# Altium PCB PCB1.PcbDoc
Units mil, origin at the board's own origin, x right, y up, seen from the top; angles counter-clockwise.
Board outline 1585 x 1070 mil, 2 copper layers (Top Layer, Bottom Layer); 15 components, 10 nets, 73 pads, 0 vias.
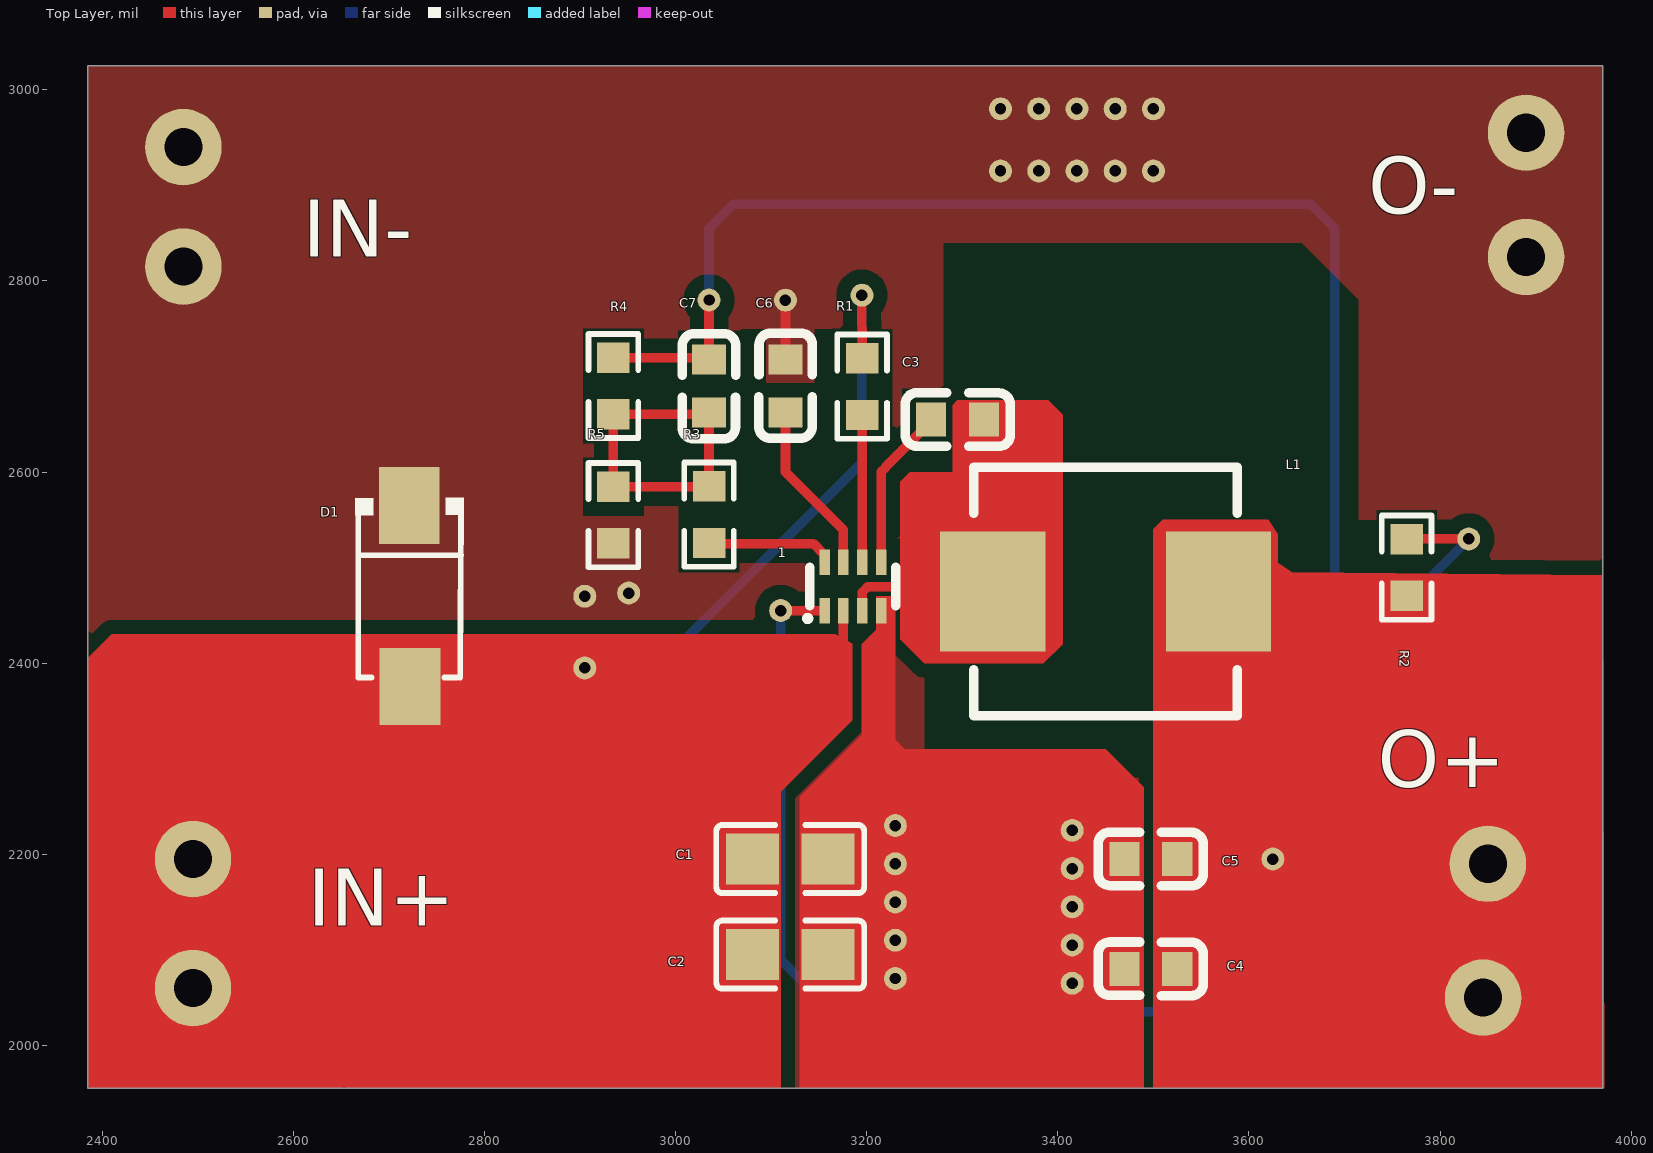
[diagram p0: Top Layer view]
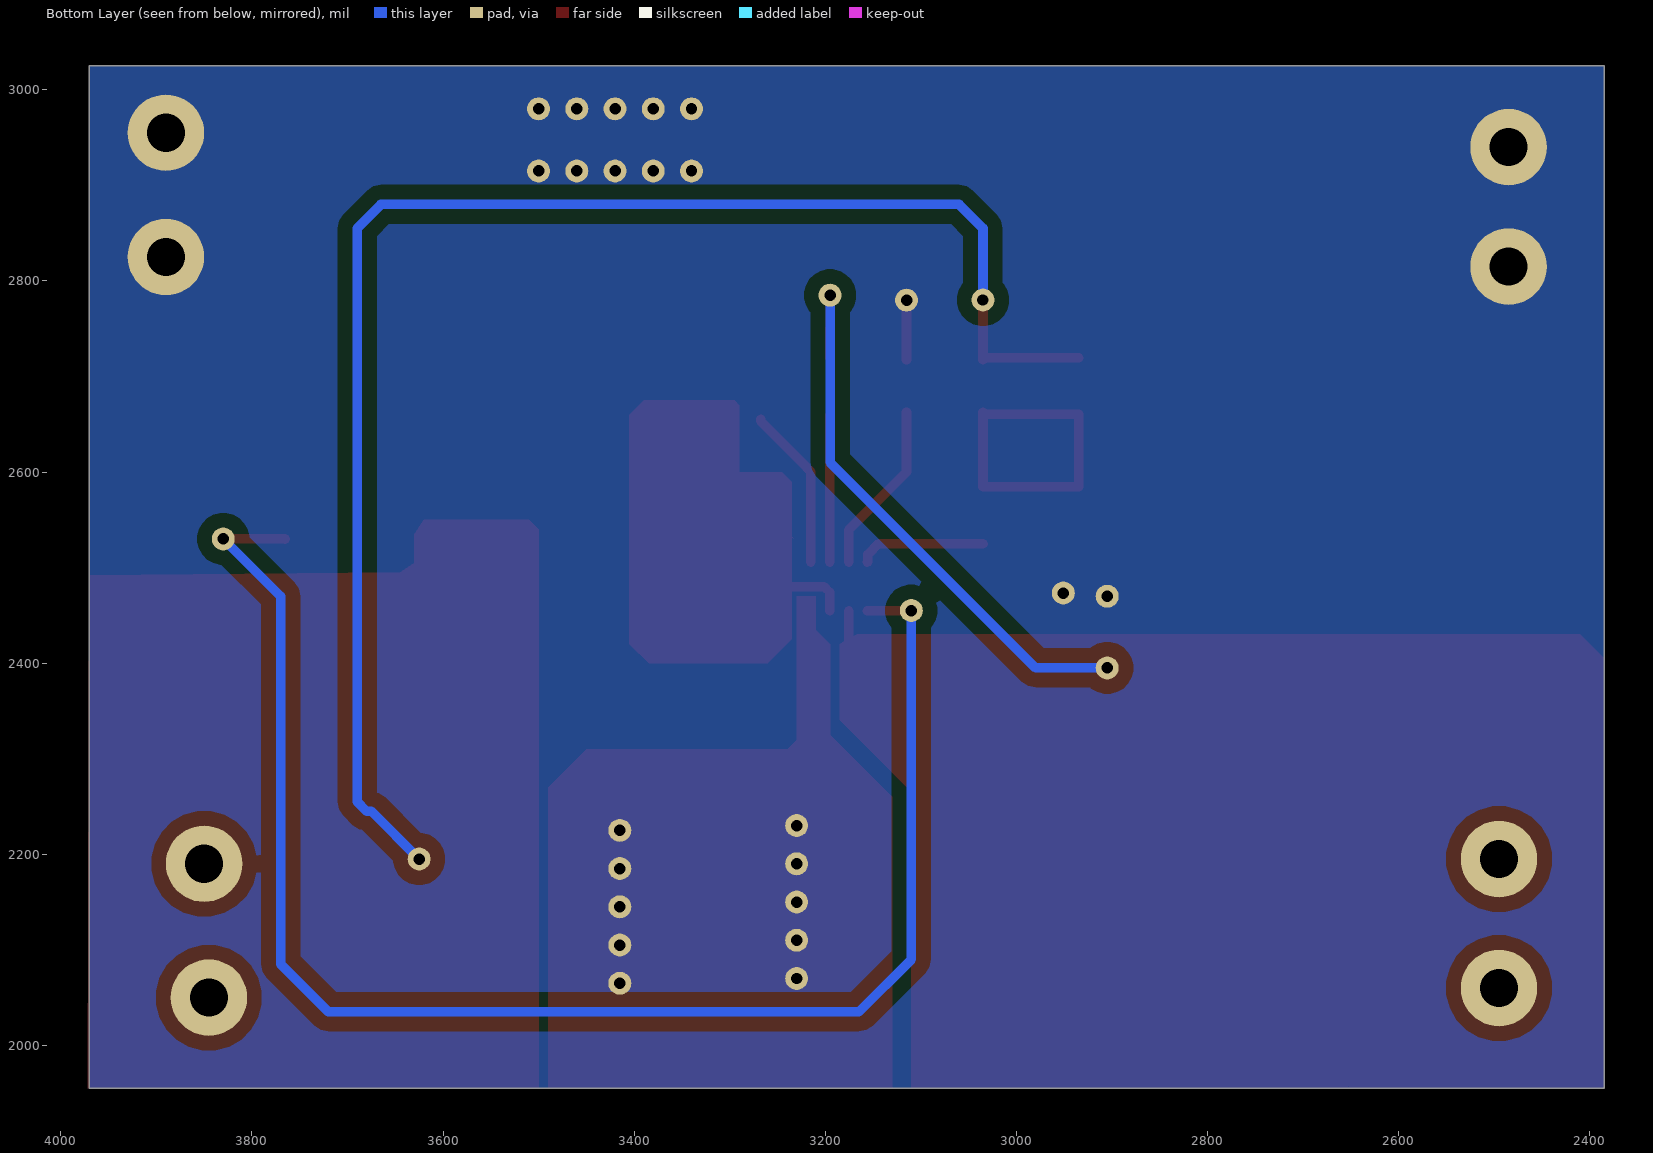
[diagram p1: Bottom Layer view, seen from below]

## Layer stack, top to bottom
Top Solder: solder mask 0.4, Solder Resist, Dk 3.5
Top Layer: signal copper 1.4
Dielectric 1: dielectric 12.6, FR-4, Dk 4.8
Bottom Layer: signal copper 1.4
Bottom Solder: solder mask 0.4, Solder Resist, Dk 3.5

## Board outline
2385,1955 2385,3025 3970,3025 3970,1955

## Design rules (kind name [scope] priority, off if disabled: settings)
Clearance poly [InPolygon] p1: gap=15 ignorepadtopadclearanceinfootprint=FALSE
Clearance Clearance_1 [All] p2: gap=5 ignorepadtopadclearanceinfootprint=FALSE
PlaneConnect [All] p1: planeconnectstyle=Direct reliefexpansion=20 reliefentries=4 reliefconductorwidth=10 reliefairgap=10
PolygonConnect [All] p1: connectstyle=Direct reliefconductorwidth=10 reliefentries=4 polygonreliefangle="90 Angle" airgapwidth=10
RoutingVias [All] p1: holewidth=28 width=50 viastyle="Through Hole" minholewidth=28 minwidth=50 maxholewidth=28 maxwidth=50
SolderMaskExpansion [All] p1: expansion=4 istentingtop=FALSE
Width [All] p1: maxlimit=10 minlimit=10 preferedwidth=10
29 further rules are at their usual default settings.

## Components (designator, comment, footprint, x,y, rotation, side; value= is the part's Value field where it differs from the comment)
1 "MP2338" PCBComponent_1 3185.31,2480.41 r270 top
C1 "22uF" C0805 3120,2195 r180 top
C2 "0.1uF" C0805 3120,2095 r180 top
C3 "0.1uF" C0603 3295,2655 r180 top
C4 "22uF" C0603 3497.44,2080 r0 top
C5 "22uF" C0603 3497.44,2195 r0 top
C6 "22nF" C0603 3115,2690 r270 top
C7 "300pF" C0603 3035,2690 r90 top
D1 "Component_2" PCBComponent_2 2725,2470 r270 top
L1 "6.8uH" IND-SMD_L7.0-W6.6 3450,2475 r0 top
R1 "191kΩ" R0603 3195.31,2689.38 r90 top
R2 "10kΩ" R0603 3765,2500 r270 top
R3 "10kΩ" R0603 3035,2555.34 r90 top
R4 "90.9kΩ" R0603 2935,2690 r90 top
R5 "10kΩ" R0603 2935,2555 r90 top

## Footprints (in the part's own frame and the unit in brackets; to place one, negate y for a bottom-side part, rotate by r counter-clockwise, add the part's x,y. Pads: shape width x height; smd on the part's side, far side on the other; paste and mask are expansions set on the pad)
C0603 [mm]
  rect 0.8x0.9 smd paste+0 mask+0.051: 1(-0.7,0) 2(0.7,0)
  silkscreen extent -1.41,-0.71 1.39,0.72
C0805 [mm]
  rect 1.41x1.35 smd paste-100 mask+0.051: 1(-1,0) 2(1,0)
  silkscreen extent -1.96,-0.9 1.96,0.9
IND-SMD_L7.0-W6.6 [mm]
  rect 2.8x3.2 smd paste+0 mask+0.051: 1(-3,0) 2(3,0)
  silkscreen extent -3.5,-3.3 3.5,3.3
PCBComponent_1 [mm]
  rect 0.68x0.28 smd: BST(-0.635,0.754) EN(-0.635,0.254) FB(-0.635,-0.746) GND(0.645,0.754) PG(0.645,-0.746) SS(-0.635,-0.246) SW(0.645,0.254) VIN(0.645,-0.246)
  silkscreen extent -0.5,-1.27 0.93,1.15
PCBComponent_2 [mm]
  rect 2.046x1.62 smd: 1(-2.406,-0.093) 2(2.402,-0.075)
  silkscreen extent -2.62,-1.52 2.16,1.36
R0603 [mil]
  rect 31.75x34.02 smd paste-3937.01 mask+2: 1(-29.66,0) 2(29.66,0)
  silkscreen extent -55,-26 55,26

## Part data
C1 C2: library part CL21A226MAQNNNE_C45783, "容值:22uF;精度:±20%;额定电压:25V;材质(温度系数):X5R;", JLCPCB Part Class=基础库, LCSC Part Name="22uF ±20% 25V", Manufacturer=SAMSUNG(三星), Manufacturer Part=CL21A226MAQNNNE, Temperature Coefficient=X5R, Tolerance=±20%, Voltage Rated=25V, Add into BOM=yes, Convert to PCB=yes, Datasheet=https://atta.szlcsc.com/upload/public/pdf/source/20160103/1457707727161.pdf, Device=CL21A226MAQNNNE_C45783, Supplier=LCSC, Supplier Footprint=0805, Supplier Part=C45783, Symbol=CL21A226MAQNNNE
  C1: Name=22uF
  C2: Name=0.1uF
C3 C4 C5 C6 C7: library part CL10A225KO8NNNC, "容值:2.2uF;精度:±10%;额定电压:16V;材质(温度系数):X5R;", JLCPCB Part Class=基础库, LCSC Part Name="2.2uF ±10% 16V", Manufacturer=SAMSUNG(三星), Temperature Coefficient=X5R, Tolerance=±10%, Voltage Rated=16V, Add into BOM=yes, Convert to PCB=yes, Datasheet=https://atta.szlcsc.com/upload/public/pdf/source/20160103/1457707709512.pdf, Device=CL10A225KO8NNNC, Manufacturer Part=CL10A225KO8NNNC, Supplier=LCSC, Supplier Footprint=0603, Supplier Part=C23630, Symbol=CL10A225KO8NNNC
  C3: Name=0.1uF
  C4 C5: Name=22uF
  C6: Name=22nF
  C7: Name=300pF
L1: library part MWSA0603S-2R2MT, "电感值:2.2uH;精度:±20%;额定电流:9.5A;直流电阻(DCR):15mΩ;", DC Resistance (DCR)=15mΩ, JLCPCB Part Class=扩展库, LCSC Part Name="2.2uH ±20% 9.5A 15mΩ", Manufacturer=Sunlord(顺络), Rated Current=9.5A, Tolerance=±20%, Add into BOM=yes, Convert to PCB=yes, Datasheet=https://atta.szlcsc.com/upload/public/pdf/source/20190729/C408445_4286F301FFB17FE93B4CE8B15A01B108.pdf, Device=MWSA0603S-2R2MT, Manufacturer Part=MWSA0603S-2R2MT, Name=6.8uH, Supplier=LCSC, Supplier Footprint=SMD, Supplier Part=C408445, Symbol=MWSA0603S-2R2MT
R1 R2 R3 R4 R5: library part 0603WAF1002T5E, "电阻类型:厚膜电阻;阻值:10kΩ;精度:±1%;功率:100mW;温度系数:±100ppm/℃;最大工作电压:75V;工作温度范围:-55℃~+155℃;", JLCPCB Part Class=基础库, LCSC Part Name="10kΩ ±1% 100mW", Manufacturer=UNI-ROYAL(厚声), Operating Temperature Range=-55℃~+155℃, Overload Voltage (Max)=75V, Power(Watts)=100mW, Temperature Coefficient=±100ppm/℃, Tolerance=±1%, Add into BOM=yes, Convert to PCB=yes, Datasheet=https://atta.szlcsc.com/upload/public/pdf/source/20200306/C422600_1E6D84923E4A46A82E41ADD87F860B5C.pdf, Device=0603WAF1002T5E, Manufacturer Part=0603WAF1002T5E, Supplier=LCSC, Supplier Footprint=0603, Supplier Part=C25804, Symbol=0603WAF1002T5E, Type=厚膜电阻
  R1: Name=191kΩ
  R2 R3 R5: Name=10kΩ
  R4: Name=90.9kΩ

## Free pads (board coordinates)
  round 24 hole 12: 3(2905,2395) 3(2905,2470) 3(2950.94,2473.35) 3(3035,2780) 3(3110,2455) 3(3115,2779.83) 3(3195,2785) 3(3230,2070) 3(3230,2110) 3(3230,2150) 3(3230,2190) 3(3230,2230) 3(3340,2915) 3(3340,2980) 3(3380,2915) 3(3380,2980) 3(3415,2065) 3(3415,2105) 3(3415,2145) 3(3415,2185) 3(3415,2225) 3(3420,2915) 3(3420,2980) 3(3460,2915) 3(3460,2980) 3(3500,2915) 3(3500,2980) 3(3625,2195) 3(3830,2530)
  round 80 hole 40: 4(2485,2815) 4(2485,2940) 4(2495,2060) 4(2495,2195) 4(3845,2050) 4(3850,2190) 4(3890,2825) 4(3890,2955)

## Nets (pads, with @x,y where several pads share a name; then routed paths per layer and width w, separated by ;. In a path a pad name is that pad's centre, name@x,y a point inside that pad or via, vN(x,y) a via of type N, cw(c..) or ccw(c..) an arc to the next point about the centre after c; other vN are vias at no path point)
GND: 1.GND C1.1 C2.1 C4.1 C5.1 C6.1 D1.1 pad.3@2905,2470 pad.3@2950.94,2473.35 pad.3@3115,2779.83 pad.3@3230,2070 pad.3@3230,2110 pad.3@3230,2150 pad.3@3230,2190 pad.3@3230,2230 pad.3@3340,2915 pad.3@3340,2980 pad.3@3380,2915 pad.3@3380,2980 pad.3@3415,2065 pad.3@3415,2105 pad.3@3415,2145 pad.3@3415,2185 pad.3@3415,2225 pad.3@3420,2915 pad.3@3420,2980 pad.3@3460,2915 pad.3@3460,2980 pad.3@3500,2915 pad.3@3500,2980 pad.4@2485,2815 pad.4@2485,2940 pad.4@3890,2825 pad.4@3890,2955 R5.1 | length 63.7
  Top Layer w10: pad.3@3113.98,2780.85 3115,2779.83 C6.1
Net1_BST: 1.BST C3.2 | length 171.3
  Top Layer w10: 1.BST 3215,2600 3220,2605 3220,2605.59 3267.44,2653.03 C3.2
Net1_EN: 1.EN R1.1 | length 154.3
  Top Layer w10: 1.EN R1.1
Net1_FB: 1.FB R3.1 | length 133.7
  Top Layer w10: R3.1@3035,2525 3144.22,2525 3155.43,2513.8 3155.43,2505.92 1.FB
Net1_PG: 1.PG pad.3@3110,2455 pad.3@3830,2530 R2.1 | length 1649.4
  Top Layer w10: pad.3@3110,2455 1.PG ; R2.1 3765.34,2530 pad.3@3830,2530
  Bottom Layer w10: pad.3@3110,2455 3110,2090 3165,2035 3720,2035 3770,2085 3770,2470 pad.3@3830,2530
Net1_SS: 1.SS C6.2 | length 182.1
  Top Layer w10: C6.2 3115,2600 3175.63,2539.37 1.SS
Net1_SW: 1.SW C3.1 L1.1 | length 160.2
  Top Layer w10: 1.SW 3195.31,2474.14 3201.17,2480 3326.89,2480 L1.1
NetC7_1: C7.1 R3.2 R4.1 R5.2 | length 354.3
  Top Layer w10: R5.2 R4.1 3032.9,2660.34 C7.1 3035,2584.66 R5.2
VIN: 1.VIN C1.2 C2.2 D1.2 pad.3@2905,2395 pad.3@3195,2785 pad.4@2495,2060 pad.4@2495,2195 R1.2 | length 795.1
  Top Layer w10: 3085,2335 3095,2345 3125,2345 3175.63,2395.63 1.VIN ; pad.3@3195,2785 R1.2
  Bottom Layer w10: pad.3@2905,2395 2980,2395 3195,2610 pad.3@3195,2785
VOUT: C4.2 C5.2 C7.2 L1.2 pad.3@3035,2780 pad.3@3625,2195 pad.4@3845,2050 pad.4@3850,2190 R2.2 R4.2 | length 1603.9
  Top Layer w10: R4.2 3032.9,2719.66 C7.2 pad.3@3035,2780
  Bottom Layer w10: pad.3@3035,2780 3035,2855 3060,2880 3665,2880 3690,2855 3690,2255 3680,2245 3675,2245 pad.3@3625,2195

## Polygon pours and split planes (outlines as drawn)
GND on Bottom Layer "GND_L02_P003" (solid, remove dead copper, pour order 3): 2385,1955 2385,3025 3970,3025 3970,1955
GND on Top Layer "GND_L01_P002" (solid, remove dead copper, pour order 2): 2385,1955 2385,3025 3970,3025 3970,1955

## Other copper
Top Layer:
  region net GND: 3490,1955 3490,2270 3450,2310 3240,2310 3230,2320 3230,2470 3210,2470 3210,2435 3195,2420 3195,2325 3130,2260 3130,1955
  pour cut-out: 3135.39,2631.69 3135.39,2608.45 3170.3,2573.54 3172.21,2575.45 3174.92,2575.45 3174.92,2628.85 3163.3,2628.85 3163.3,2749.92 3163.22,2750 3145,2750 3145,2634.41 3147.72,2631.69
  pour cut-out: 3644.39,2550 3644.39,2514.09 3648.23,2510.25 3728.66,2510.25 3729.44,2509.47 3732.96,2512.99 3732.99,2512.99 3735,2550 3722.46,2550
  pour cut-out: 3280,2840 3280,2690 3280.87,2689.13 3395.85,2689.13 3419.13,2665.85 3419.13,2414.15 3389.69,2384.71 3260,2384.71 3260,2280 3485,2280 3485,2539.71 3484.71,2540 3504.15,2559.44 3504.15,2564.13 3625.85,2564.13 3639.98,2550 3715,2550 3715,2780 3655,2840 3275,2840
  pour cut-out: 3136.15,2547.31 3134.24,2545.39 3067.01,2545.39 3067.01,2615.88 3055.39,2615.88 3055.39,2631.69 3067.72,2631.69 3067.72,2748.31 3069.41,2750 3095,2750 3095,2644.41 3082.28,2631.69 3094.61,2631.69 3094.61,2593.75 3136.15,2552.21
  region net Net1_SW: 3232.3,2529.92 3272.38,2570 3308.53,2570
  region net Net1_SW: 3235,2532.62 3272.38,2570 3306.09,2570 3306.09,2675 3295,2675 3290,2670 3290,2600 3245,2600 3235,2590
  region net Net1_SW: 3385,2400 3405,2420 3405,2660 3390,2675 3306.09,2675 3306.09,2570 3235,2532.62 3235,2425 3260,2400
  region net VIN: 2385,2342.25 2385,2405 2410,2430 3167.3,2430 3185,2420.05 3185,2340 3106.01,2261.01
  region net VOUT: 3620,2550 3510,2550 3500,2540 3500,1955 3971.67,1955 3970,2491.82 3645,2495 3630,2505 3630,2535
  region net VIN: 2657.73,2375 2385,2375 2385,1955 2652.27,1955
  region net VIN: 2600,2350 2625,2375 3075,2375 3110,2340 3110,1955 2655,1955 2595,2015

## Silkscreen, mask and mechanical layers (free items; w line width, h text height)
Top Overlay:
  text "O-" at 3725,2870 h60
  text "IN-" at 2610,2825 h60
  text "O+" at 3735,2270 h60
  text "IN+" at 2615,2125 h60
Mechanical 1:
  lines w10: 2385,1955 2671.25,1955 3463.75,1955 3562.81,1955 3760.94,1955 3970,1955 3970,3025 2385,3025 2385,1955